# Altium PCB Capacitive_touch_activated_led.PcbDoc
Units mil, origin at the board's own origin, x right, y up, seen from the top; angles counter-clockwise.
Board outline 3173.32 x 1665 mil, 2 copper layers (Top Layer, Bottom Layer); 18 components, 13 nets, 42 pads, 0 vias.
Unrouted connection lines stored in the file: 6.
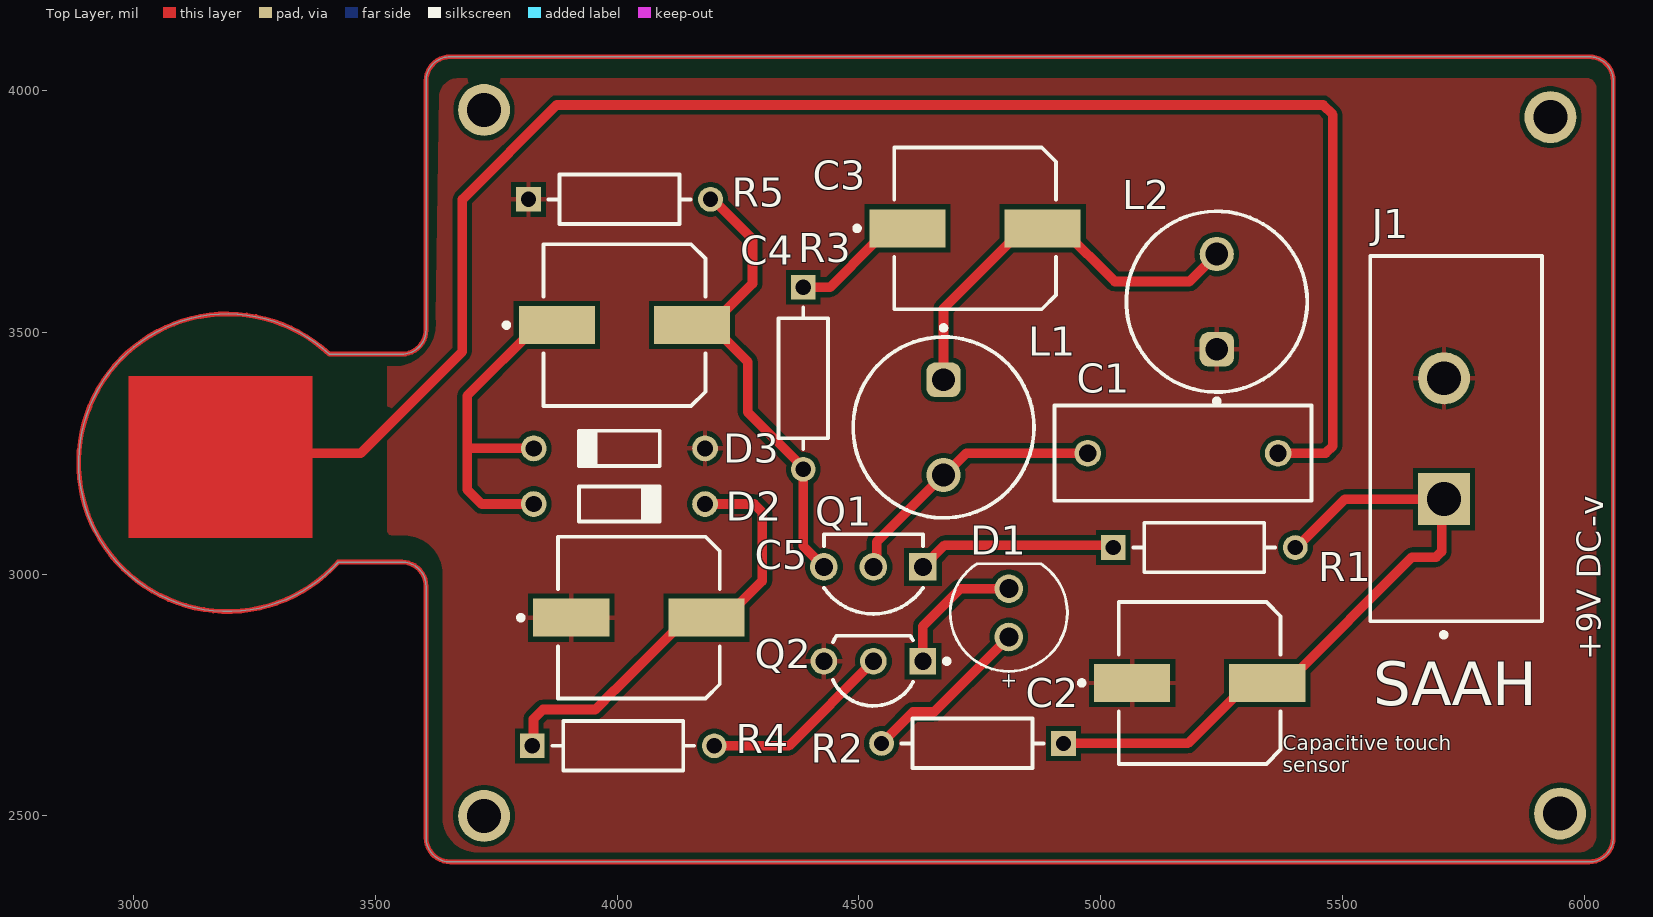
[diagram p0: Top Layer view]
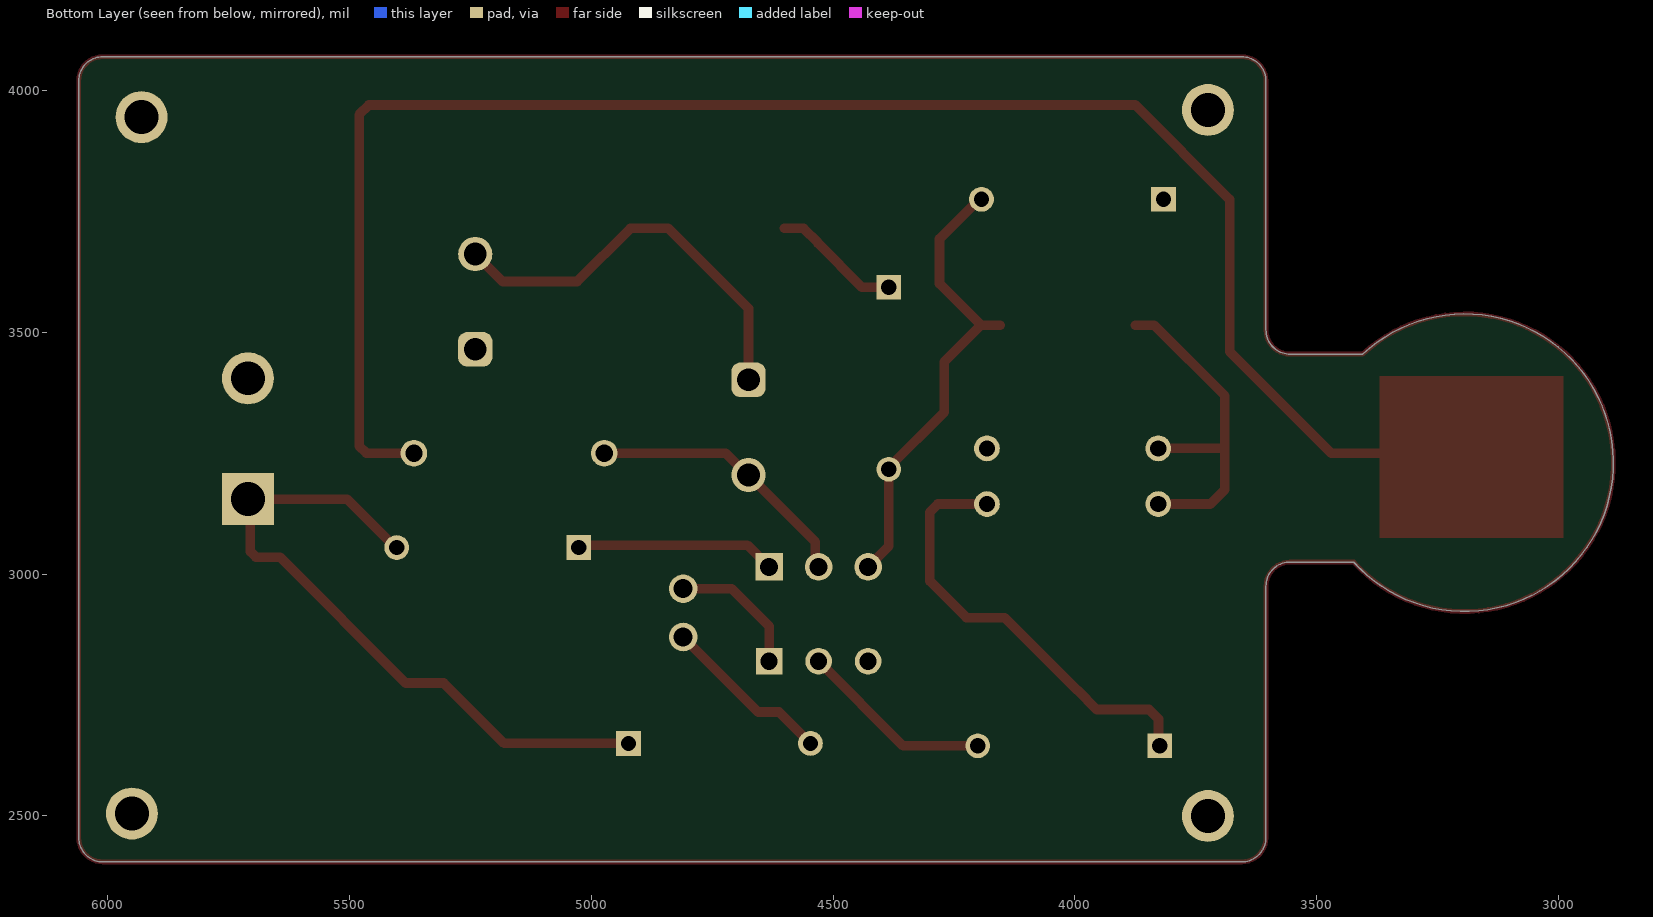
[diagram p1: Bottom Layer view, seen from below]
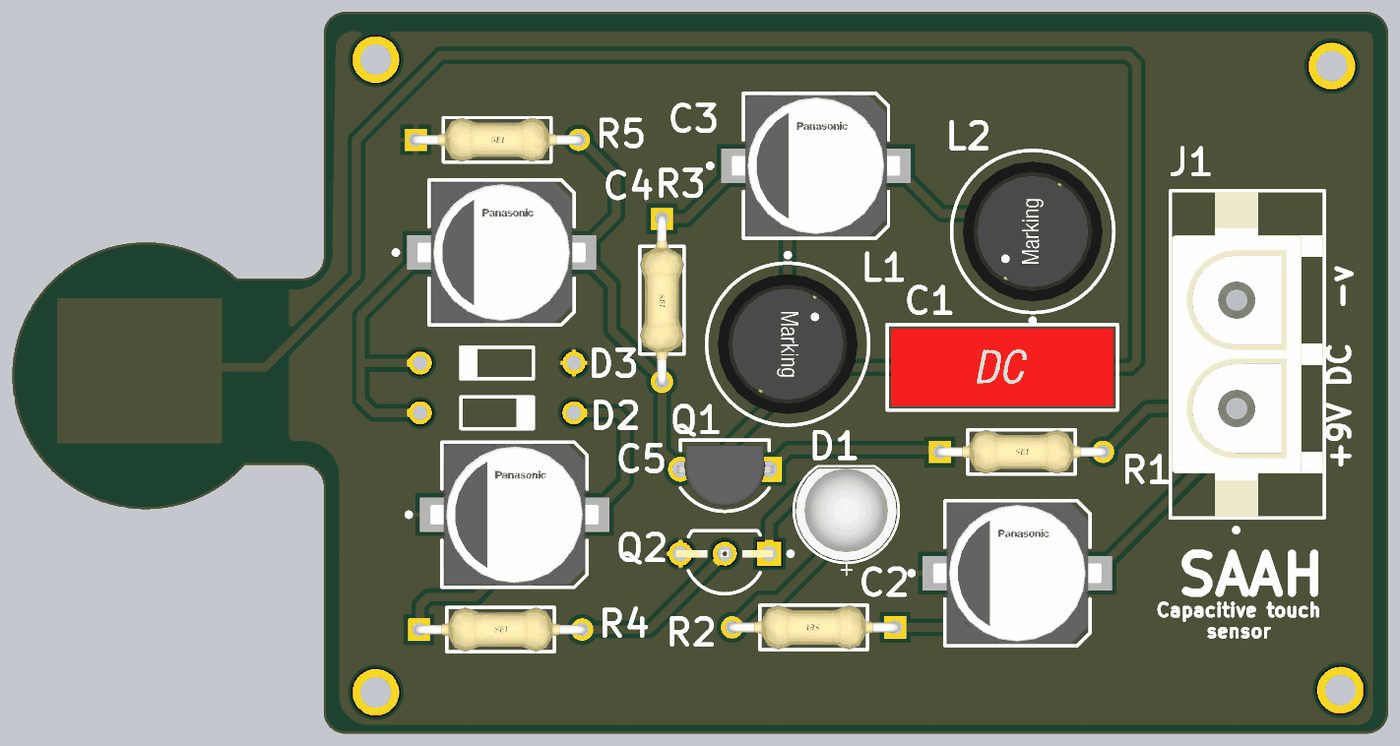
[diagram p2: 3D render of the assembled board from above, using the file's embedded part models]

## Layer stack, top to bottom
Top Solder: solder mask 0.4, Solder Resist, Dk 3.5
Top Layer: signal copper 1.4
Dielectric 1: dielectric 12.6, FR-4, Dk 4.8
Bottom Layer: signal copper 1.4
Bottom Solder: solder mask 0.4, Solder Resist, Dk 3.5

## Board outline
3423.18,3024.79 cw(c3194.3,3230.42) 3404.62,3455 3555,3455 ccw(c3555,3505) 3605,3505 3605,4020 cw(c3655,4020) 3655,4070 6010,4070 cw(c6010,4020) 6060,4020 6060,2455 cw(c6010,2455) 6010,2405 3655,2405 cw(c3655,2455) 3605,2455 3605,2975 ccw(c3555,2975) 3555,3025

## Design rules (kind name [scope] priority, off if disabled: settings)
Clearance [All] p1: gap=10 ignorepadtopadclearanceinfootprint=FALSE
PolygonConnect [All] p1: connectstyle=Relief reliefconductorwidth=10 reliefentries=4 polygonreliefangle="90 Angle" airgapwidth=10
RoutingVias [All] p1: holewidth=28 width=50 viastyle="Through Hole" minholewidth=28 minwidth=50 maxholewidth=28 maxwidth=50
SolderMaskExpansion [All] p1: expansion=4 istentingtop=FALSE
SupplyNets "Schematic Supply Nets_2" [InNet('CAPACITIVE PLATE')] p1: voltage=0.000
SupplyNets "Schematic Supply Nets_1" [InNet('VCC')] p2: voltage=0.000
SupplyNets "Schematic Supply Nets" [InNet('GND')] p3: voltage=0.000
Width [All] p1: maxlimit=30 minlimit=10 preferedwidth=20 minimp=50.000000 maximp=50.000000 favimp=50.000000
30 further rules are at their usual default settings.

## Components (designator, comment, footprint, x,y, rotation, side; value= is the part's Value field where it differs from the comment)
C1 "22nF" WCAP-FTXX_L13W4.5H9.5_CS 5170,3250 r0 top
C2 "100nF" FP-HDF-MFG 5204.76,2775 r0 top
C3 "100nF" FP-HDF-MFG 4740.24,3715 r0 top
C4 "1nF" FP-HDF-MFG 4015.24,3515 r0 top
C5 "10nF" FP-HDF-MFG 4045,2910 r0 top
D1 "LED" WL-TMRC_D5.9H8.7 4810.01,2919.99 r90 top
D2 "1N4148" NXP-SOD27-2_V 4004.72,3145 r0 top
D3 "1N4148" NXP-SOD27-2_V 4004.72,3260 r180 top
J1 "350428-1" FP-350428-1-MFG 5735,3280 r90 top
L1 "50mH" WE-TI_8012 4675,3303.43 r270 top
L2 "50mH" WE-TI_8012 5240,3563.43 r90 top
Q1 "BS170-D75Z" FP-135AR-MFG 4530,3000 r270 top
Q2 "BC547BRL1G" ONSC-TO-92-3-29-11_AM_BL 4530,2820 r180 top
R1 "1k" FP-CF14-MFG 5214.21,3055 r0 top
R2 "10k" FP-CF14-MFG 4735,2650 r180 top
R3 "470k" FP-CF14-MFG 4385,3405 r270 top
R4 "10k" FP-CF14-MFG 4012.72,2645 r0 top
R5 "4.7k" FP-CF14-MFG 4005,3775 r0 top

## Footprints (in the part's own frame and the unit in brackets; to place one, negate y for a bottom-side part, rotate by r counter-clockwise, add the part's x,y. Pads: shape width x height; smd on the part's side, far side on the other; paste and mask are expansions set on the pad)
FP-135AR-MFG [mm]
  rect 1.45x1.45 hole 0.95 paste-2539.97 mask+0: 1(-0.38,2.6)
  round 1.45 hole 0.95 paste-2539.97 mask+0: 2(-0.38,0) 3(-0.38,-2.6)
  silkscreen extent -2.09,-2.6 2.09,2.6, body extent -2.19,-3.42 2.19,3.42, height 0.25
FP-350428-1-MFG [mm]
  rect 2.73x2.73 hole 1.78 paste-2539.97 mask+0: 1(-3.175,0.635)
  round 2.73 hole 1.78 paste-2539.97 mask+0: 2(3.175,0.635)
  silkscreen extent -10.42,-4.51 9.59,4.51, body extent -9.69,-4.61 9.69,4.61, height 0.25
FP-CF14-MFG [mm]
  rect 1.3x1.3 hole 0.8 paste-2539.97 mask+0: 1(-4.78,0)
  round 1.3 hole 0.8 paste-2539.97 mask+0: 2(4.78,0)
  silkscreen extent -3.73,-1.3 3.73,1.3, body extent -5.53,-1.4 5.53,1.4, height 0.25
FP-HDF-MFG [mm]
  rect 4x2 smd paste+0 mask+0: 1(-3.55,0) 2(3.55,0)
  silkscreen extent -6.32,-4.25 4.25,4.25, body extent -5.8,-4.5 5.8,4.5, height 0.25
NXP-SOD27-2_V [mm] "SOD27, 2-Leads, Dia 1.85mm, Body Length 4.25mm, Pin Spacing 9mm"
  round 1.35 hole 0.85: 1(-4.5,0) 2(4.5,0)
  silkscreen extent -2.12,-0.92 2.12,0.92, body extent -4.78,-0.92 4.78,0.92, height 1.84
ONSC-TO-92-3-29-11_AM_BL [mm] "TO, 3-Leads, Body Dia 4.7mm, Pitch 2.6mm"
  rect 1.4x1.4 hole 0.9: 1(-2.6,0)
  round 1.4 hole 0.9: 2(0,0) 3(2.6,0)
  silkscreen extent -3.98,-1.34 2.13,2.35, body extent -2.84,-1.34 2.84,2.35, height 5.33
WCAP-FTXX_L13W4.5H9.5_CS [mm] "Film Capacitors, 13x4.5x9.5mm"
  round 1.4 hole 0.9: 1(-5,0) 2(5,0)
  silkscreen extent -6.75,-2.5 6.75,2.5, body extent -6.5,-2.25 6.5,2.25, height 9.55
WE-TI_8012 [mm] "Radial Leaded Wire Wound Inductor, body diameter 9.5mm"
  rrect50% 1.8x1.8 hole 1.2: 1(-2.5,0)
  round 1.8 hole 1.2: 2(2.5,0)
  silkscreen extent -5.35,-4.75 4.75,4.75, body extent -4.1,-4.1 4.1,4.1, height 13.55
WL-TMRC_D5.9H8.7 [mm] "THT Mono-color Round Color LED, 2-leads"
  round 1.5 hole 1: 1(-1.27,0) 2(1.27,0)
  silkscreen extent -3.07,-3.07 2.58,3.08, body extent -2.95,-2.95 2.45,2.95, height 9.2

## Part data
C1: library part CMP-03913-51400141-2, "890334023011CS WCAP-FTXX Film Capacitor 22nF 310Vac", Case/Package=Radial, Dielectric=PP, Insulation Resistance=30GΩ, Max Operating Temperature=105°C, Min Operating Temperature=-40°C, Tolerance=10%, Voltage Rating=310V, Capacitance=22nF, Dielectric Material=PP, Height=9.5mm, Height - Seated (Max)=10.0076mm, Hole Diameter=900µm, Lead Pitch=10.0076mm, Length=13mm, Mount="Through Hole", NexarPartId=51400141, Packaging=Carton, Pin Length=4mm, Pitch=10mm, REACH SVHC=Unknown, RoHS=Compliant, Termination="PC Pins", Voltage Rating (AC)=310V, Voltage Rating (DC)=310V, Width=4.5mm
C2 C3 C4 C5: library part CMP-05427-000023-1, "CAP ALUM 10UF 20% 100V SMD", Capacitance=10uF, Case/Package=Radial, Dielectric Material=Aluminium, ESR (Equivalent Series Resistance)=1.5R, Leakage Current=3uA, Max Operating Temperature=105°C, Min Operating Temperature=-40°C, Package Quantity=1, Ripple Current=55mA, Tolerance=20%, Voltage=100V, Construction=Cylindrical, Contact Plating=Tin, Diameter=8mm, Dissipation Factor=0.18%, Height=10.2mm, Height - Seated (Max)=0.402inch, Impedance=1.5R, Lead Free="Lead Free", Lead Pitch=3.1mm, Length=10.2mm, Life (Hours)=5000Hour, Mount="Surface Mount", Number of Pins=2, Packaging="Tape and Reel", Polarity=Polar, Radiation Hardening=No, Ripple Current (AC)=55mA, RoHS Compliant=Yes, Series=HD, Termination=SMD/SMT, Voltage Rating=100V, Voltage Rating (DC)=100V
D1: library part CMP-03913-71241449-1, "151051SS04000 WL-TMRC THT Mono-color Round Color", Forward Current=100mA, Forward Voltage=2.1V, Max Operating Temperature=85°C, Max Reverse Voltage (DC)=5V, Min Operating Temperature=-40°C, Dominant Wavelength=635nm, Height=8.6mm, Length=5mm, Luminous Intensity=250mcd, Mount="Through Hole", NexarPartId=71241449, Packaging=Bulk, Peak Wavelength=640nm, RoHS=Compliant, Viewing Angle=40°, Wavelength=635nm, Width=5mm
D2 D3: library part CMP-0648-00002-1, "High-speed Diode, 100 V, 450 mA, 2-Pin SOD27, RoHS", Manufacturer="NXP Semiconductors", Cd="4 pF Max.", ComponentLink1Description="Manufacturer URL", ComponentLink1URL=http://www.nxp.com/, ComponentLink2Description=Datasheet, ComponentLink2URL=http://www.nxp.com/documents/data_sheet/1N4148_1N4448.pdf, ComponentLink3Description="Package Specification", ComponentLink3URL=http://www.nxp.com/documents/data_sheet/1N4148_1N4448.pdf, Configuration=Single, DatasheetVersion=Aug-04, IF="200 mA Max.", IFRM="450 mA", IFSM="4 A Max.", IR (VR="20 V)=25 nA", Mounting Technology="Through Hole", PackageDescription="2-Pin Hermetically Sealed Glass Package, Axial Leaded, Dia 1.85 mm, Body Length 4.25 mm, Lead Spread 25.4 mm", PackageReference=SOD27, PackageVersion=Aug-04, PartNumber=1N4148, RoHS=TRUE, Trr="4 ns Max.", VF (IF="10 mA)=1 V", VR="100 V Max."
J1: library part CMP-03369-000080-1, "CONN HEADER VERT 2POS 6.35MM", Current Rating=12A, Manufacturer="TE Connectivity", Temperature="-40°C to +105°C", Temperature Range High=+105°C, Temperature Range Low=-40°C, Voltage Rating=600V, Automotive=No, Category=Conn, ComponentLink2Description=Datasheet, ComponentLink2URL=https://www.te.com/commerce/DocumentDelivery/DDEController?Action=showdoc&DocId=Customer+Drawing%7F350428%7FY2%7Fpdf%7FEnglish%7FENG_CD_350428_Y2.pdf%7F350428-1, Conn Gender=Male, Conn Orientation=Vertical, Contact Material=Gold,Nickel, Device Class L1=Connectors, Device Class L2="Headers and Wire Housings", Device Class L3=unset, Digikey Description="CONN HEADER VERT 2POS 6.35MM", Height=14.99mm, Lead Free=Yes, Manufacturer Part Number=350428-1, Mouser Description="Connector, Soft Shell; Universal MATE-N-LOK; 2; Nylon; Natural; 19 A; 600 VAC", Number Of Contacts=2, Number Of Rows=1, Octopart=https://octopart.com/350428-1-te+connectivity-46505355, Package=350428-1, Pitch=6.35mm, RoHS=TRUE, Standoff Height=0.63mm
L1 L2: library part CMP-1405-00015-3, Ambient Temperature Range High=85°C, Ambient Temperature Range Low=-40°C, Current Rating=50mA, DC Resistance (DCR)=90Ω, Inductance=68mH, Inductance Tolerance=5%, Max Operating Temperature=125°C, Self Resonant Frequency=160kHz, Height=13.5mm, Length=9.5mm, Min Operating Temperature=-40°C, NexarPartId=24533258, Number of Pins=2, Packaging=Bulk, RoHS=Compliant, Width=9.5mm
Q1: library part CMP-00278-84793704-1, "BS170-D75Z BS170 Series 60 V 5 Ohm N-Channel Enhancement Mode Field Effect Transistor-TO-92", Continuous Drain Current (ID)=500mA, Drain to Source Breakdown Voltage=60V, Drain to Source Resistance=1.2Ω, Gate to Source Voltage (Vgs)=20V, Manufacturer Lifecycle Status=ACTIVE, Max Junction Temperature (Tj)=150°C, Min Operating Temperature=-55°C, Power Dissipation=830mW, Drain to Source Voltage (Vdss)=60V, Height=8.77mm, Lifecycle Status=Production, Max Operating Temperature=150°C, NexarPartId=84793704, Number of Channels=1, RoHS=Compliant, Schedule B="8541210080, 8541210080", Turn-Off Delay Time=10ns, Turn-On Delay Time=10ns
Q2: library part CMP-1048-01605-1, "Amplifier Transistor, NPN Silicon, 3-Pin TO-92, Pb-Free, Tape and Reel", Manufacturer="On Semiconductor", ComponentLink1Description="Manufacturer URL", ComponentLink1URL=http://www.onsemi.com/, ComponentLink2Description=Datasheet, ComponentLink2URL=http://www.onsemi.com/pub_link/Collateral/BC546-D.PDF, ComponentLink3Description="Package Specification", ComponentLink3URL=http://www.onsemi.com/pub_link/Collateral/MAC97-D.PDF, DatasheetVersion="Rev. 7", fT Min (MHz)=150, IC Continuous (A)=0.1, Mounting Technology="Through Hole", PackageDescription="3-Pin Transistor Outline, Body 4.825 x 3.685 mm, Pitch 1.27 mm", PackageReference=TO-92-3-29-11_AM_BL, PackageVersion="Rev. AM", Packing="Tape and Reel", PartNumber=BC547BRL1G, Polarity=NPN, RoHS=TRUE
R1 R2 R3 R4 R5: library part CMP-26528-000003-1, "RES 7.5K OHM 1/4W 5% AXIAL", Case/Package=Axial, Max Operating Temperature=155°C, Max Power Dissipation=250mW, Min Operating Temperature=-55°C, Resistance=7.5kR, Resistor Type="Carbon Film", Temperature Coefficient=-400ppm/°C, Tolerance=5%, Contact Plating=Tin, Diameter=2.3mm, Features="Flame Retardant Coating", Lead Free="Lead Free", Length=0.256inch, Mount="Through Hole", Number of Terminations=2, Packaging="Tape and Reel", Power Rating=250mW, Radiation Hardening=No, RoHS Compliant=Yes, Series=CF

## Free pads (board coordinates)
  round 107.48 hole 70.71: 2(3725,3960) 3(5930,3945) 4(5950,2505) 5(3725,2500)

## Nets (pads, with @x,y where several pads share a name; then routed paths per layer and width w, separated by ;. In a path a pad name is that pad's centre, name@x,y a point inside that pad or via, vN(x,y) a via of type N, cw(c..) or ccw(c..) an arc to the next point about the centre after c; other vN are vias at no path point)
"CAPACITIVE PLATE": C1.2 | length 3435.4
  Top Layer w20: 3340,3250 3470,3250 3680,3460 3680,3775 3875,3970 5460,3970 5480,3950 5480,3265 5465,3250 C1.2
GND: C2.1 C5.1 D3.1 J1.2 L2.1 Q2.3 R5.1
NetC1_1: C1.1 L1.2 Q1.2 | length 566.9
  Top Layer w20: Q1.2 4537.1,3022.06 4537.1,3067.1 L1.2 4677.54,3205 4722.54,3250 C1.1
NetC3_1: C3.1 R3.1 | length 266.7
  Top Layer w20: R3.1 4440.59,3593.19 4531.73,3684.33 4531.73,3685.63 4561.1,3715 C3.1
NetC3_2: C3.2 L1.1 L2.2 | length 867.5
  Top Layer w20: L1.1@4685.63,3412.48 L1.1 4675,3549.37 4840.63,3715 C3.2 4919.37,3715 5029.37,3605 5183.15,3605 L2.2 L2.2@5238.43,3663.43
NetC4_1: C4.1 D2.1 D3.2 | length 733.1
  Top Layer w20: D3.2@3823.54,3255.98 D3.2 3690,3260 ; D2.1 3720,3145 3690,3175 3690,3260 ; C4.1 3836.1,3515 3690,3368.9 3690,3260
NetC4_2: C4.2 Q1.3 R3.2 R5.2 | length 970.4
  Top Layer w20: C4.2 C4.2@4194.37,3515 ; R5.2 4198.28,3775 4280,3693.28 4280,3600.63 C4.2@4194.37,3515 ; Q1.3 4385,3057.6 R3.2 4385,3220 4270,3335 4270,3439.37 C4.2@4194.37,3515
NetC5_2: C5.2 D2.2 R4.1 | length 915.1
  Top Layer w20: R4.1 3827.31,2647.78 3827.31,2700.59 3846.72,2720 3955,2720 3995,2760 3995.39,2760 4145.39,2910 C5.2 4224.13,2910 4300,2985.87 4300,3128.28 4283.28,3145 D2.2
NetD1_1: D1.1 R2.2 | length 354.3
  Top Layer w20: R2.2 4611.81,2715 4655,2715 D1.1
NetD1_2: D1.2 Q2.1 | length 282.2
  Top Layer w20: Q2.1 4632.36,2892.36 4710,2970 D1.2
NetQ1_1: Q1.1 R1.1 | length 414.4
  Top Layer w20: Q1.1 4677.4,3060 5021.02,3060 R1.1
NetQ2_2: Q2.2 R4.2 | length 401.6
  Top Layer w20: R4.2 4355,2645 Q2.2
VCC: C2.2 J1.1 R1.2 R2.1 | length 1405.5
  Top Layer w20: R2.1 5180.16,2650 5305.16,2775 C2.2 5383.9,2775 5643.9,3035 5693.28,3035 5705,3046.72 5705,3150 J1.1 5505,3155 5405,3055 R1.2
copper on no net: | length 9520
  Top Layer w10: 3422.94,3025 3555,3025 cw(c3555,2975) 3605,2975 3605,2455 ccw(c3655,2455) 3655,2405 6010,2405 ccw(c6010,2455) 6060,2455 6060,4020 ccw(c6010,4020) 6010,4070 3720,4070 3655,4070 ccw(c3655,4020) 3605,4020 3605,3505 cw(c3555,3505) 3555,3455 3404.62,3455 ccw(c3194.3,3230.42) 3423.18,3024.79

## Polygon pours and split planes (outlines as drawn)
GND on Top Layer "GND_L01_P002" (solid, pour order 2): 3525,3090 ccw(c3535,3090) 3535,3080 3560,3080 cw(c3560,3000) 3640,3000 3640,2495 ccw(c3710,2495) 3710,2425 5990,2425 ccw(c5990,2460) 6025,2460 6025,4005 ccw(c6005,4005) 6005,4025 3680,4025 ccw(c3672.5,3985) 3632.5,3992.5 3625,3530 cw(c3537.5,3517.5) 3550,3430 3525,3430

## Other copper
Top Layer:
  rectangle net "CAPACITIVE PLATE": 2990,3075 3370,3410

## Silkscreen, mask and mechanical layers (free items; w line width, h text height)
Top Overlay:
  text "-v" at 6039.38,3096.61 h50 r90
  text "+9V DC" at 6034.38,2821.61 h50 r90
  text "SAAH" at 5564,2729 h90
  text "Capacitive touch  / sensor" at 5376.61,2590.62 h30

## Text inside footprints (layer, text, board x,y; h text height)
D1: Top Overlay "+" at 4823,2760.54 h31.5 r90